# EAGLE board Supplemental Power Switch System (EAGLE 8.0.1)
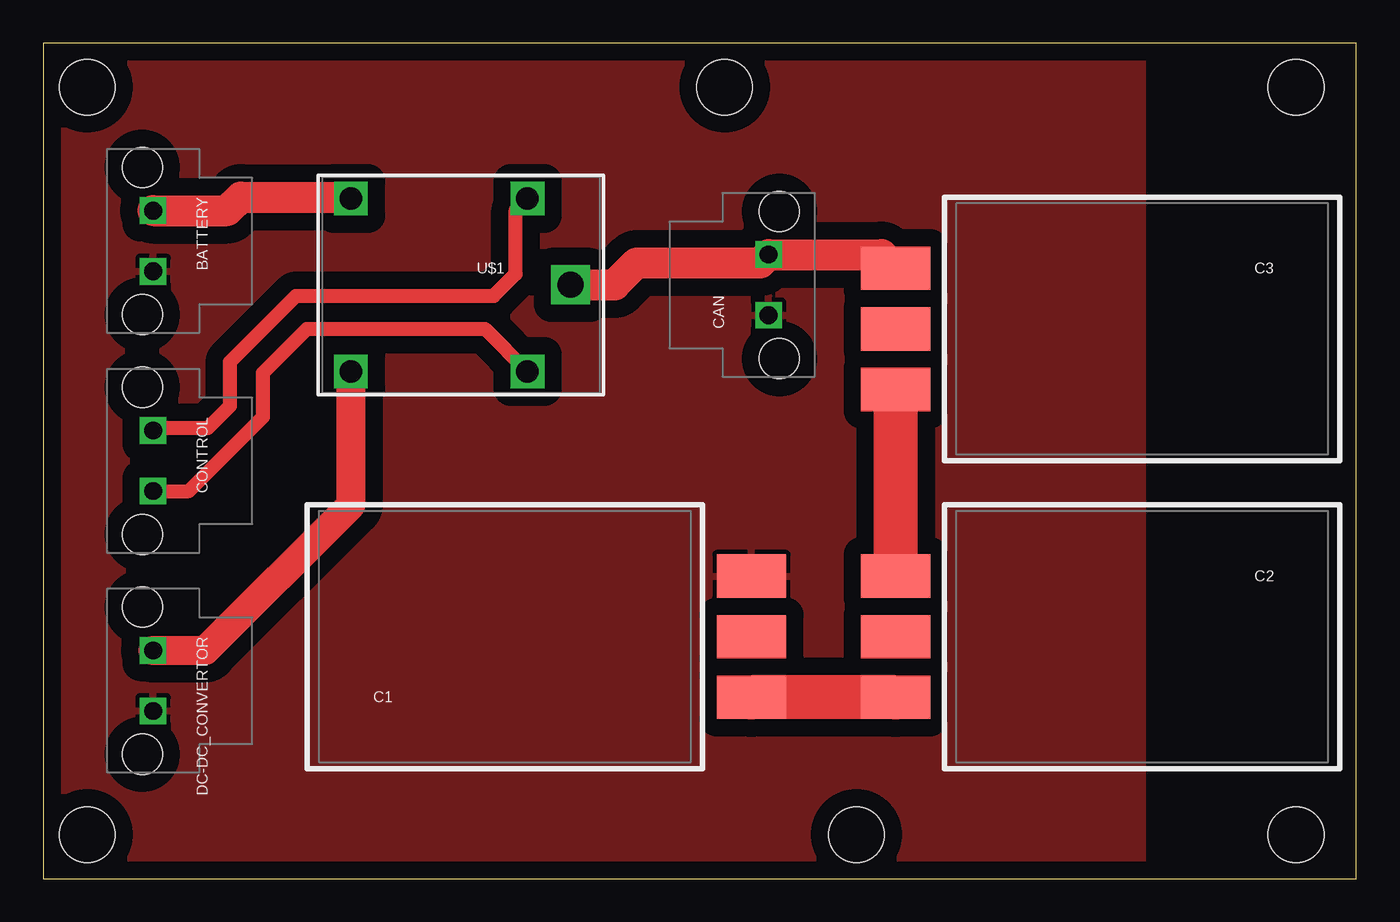
[diagram p0: board, top side]

Size 75.87 x 48.25 mm. Coordinates in mm from the lower left corner, seen from the top.
Outline: 0,0 75.87,0 75.87,48.25 0,48.25 0,0
Copper layers (1*16): Top 0.035mm / dielectric 1.5mm / Bottom 0.035mm
Design rules "default": minimum track width 10mil, minimum drill 24mil, track to track 8mil, track to pad 8mil, pad to pad 8mil, via to via 8mil, smd to smd 8mil, copper to edge 40mil, drill to drill 8mil, minimum pad ring 10mil, minimum via ring 8mil, stop-mask expansion 4mil, vias tented up to drill 0mil, thermal gap 10mil
Holes 3.2 mm at 2.54,2.54 46.99,2.54 39.37,45.72 2.54,45.72 72.39,45.72 72.39,2.54

## Footprints (pad centres in the part's own frame; a part is rotated, then mirrored left to right if it is on the bottom)
MOLEX-172287 = drill 1.02 square: 1 -1.75,0; 2 1.75,0 | hole 2.3: -4.25,-0.63; 4.25,-0.63
DMF = smd 4 x 2.5: + 14.25,-3.5; - 14.25,3.5; B 14.25,0
G8QN-1C4 = drill 1.5 square: 1 -6.35,0 | drill 1.3 square: 2 -3.85,5; 3 6.35,5; 4 6.35,-5; 5 -3.85,-5

## Placement (x,y rotation side)
BATTERY  MOLEX-ULTRA-FIT  [MOLEX-172287]  6.35,36.83 270 top
C1  SUPER-CAPACITOR  [DMF]  26.67,13.97 0 top
C2  SUPER-CAPACITOR  [DMF]  63.5,13.97 180 top
C3  SUPER-CAPACITOR  [DMF]  63.5,31.75 180 top
CAN  MOLEX-ULTRA-FIT  [MOLEX-172287]  41.91,34.29 90 top
CONTROL  MOLEX-ULTRA-FIT  [MOLEX-172287]  6.35,24.13 270 top
DC-DC_CONVERTOR  MOLEX-ULTRA-FIT  [MOLEX-172287]  6.35,11.43 270 top
FRAME1  FRAME-LETTERNO_PACKAGE  [DUMMY]  -13.97,15.24 0 top  (outside the outline)
U$1  SPDT_RELAY  [G8QN-1C4]  24.13,34.29 180 top

## Library data of the parts
BATTERY C1-C3 CAN CONTROL DC-DC_CONVERTOR U$1 = Hooman
FRAME1 = SparkFun-Aesthetics; DESIGNER: Nobody; VERSION: v01

## Nets
12V: C3.+ CAN.2 U$1.1
GND: BATTERY.2 C1.- CAN.1 DC-DC_CONVERTOR.2
N$1: C1.+ C2.-
N$2: C2.+ C3.-
NC: BATTERY.1 U$1.4
NO: DC-DC_CONVERTOR.1 U$1.3
ZEVA+: CONTROL.2 U$1.2
ZEVA-: CONTROL.1 U$1.5

## Tracks (layer width: path | path; a pad name or v marks a point on that pad's centre or on a via)
12V
  Top 1.778: U$1.1 33.02,34.29 34.29,35.56 41.43,35.56 CAN.2 48.46,36.04 C3.+
GND
  pour Top (isolate 1.016): 0,48.26 63.5,48.26 63.5,0 0,0
N$1
  Top 2.54: C2.- C1.+
N$2
  Top 2.54: C3.- C2.+
NC
  Top 1.778: BATTERY.1 10.64,38.58 11.43,39.37 17.7,39.37 U$1.4
NO
  Top 1.676: DC-DC_CONVERTOR.1 9.37,13.18 17.78,21.59 U$1.3
ZEVA+
  Top 0.813: CONTROL.2 8.41,22.38 12.7,26.67 12.7,29.21 15.24,31.75 25.52,31.75 U$1.2
ZEVA-
  Top 0.813: CONTROL.1 6.5,26.04 9.53,26.04 10.79,27.3 10.79,29.84 14.61,33.66 26.04,33.66 27.3,34.92 27.3,38.62 U$1.5